# EAGLE board HW_EP02_Circuit_Part_Current&Resistance (EAGLE 9.7.0)

Size 296.37 x 30.69 mm. Coordinates in mm from the lower left corner, seen from the top.
Outline: 0,0 296.37,0 296.37,30.69 0,30.69 0,0
Copper layers (1*16): Top 0.035mm / dielectric 1.5mm / Bottom 0.035mm
Design rules "default": minimum track width 6mil, minimum drill 0.35mm, track to track 6mil, track to pad 6mil, pad to pad 6mil, via to via 6mil, smd to smd 6mil, copper to edge 40mil, drill to drill 6mil, minimum pad ring 10mil, minimum via ring 8mil, stop-mask expansion 4mil, vias tented up to drill 0mil, thermal gap 10mil

## Footprints (pad centres in the part's own frame; a part is rotated, then mirrored left to right if it is on the bottom)
BATTERY-GENERIC = drill 1.118 pad 3.15 octagon: + 2.54,0; - -2.54,0
RESAD1016W63L850D250B = drill 0.83 pad 1.43: 1 -5.08,0; 2 5.08,0

## Placement (x,y rotation side)
P1  BATTERYGENERIC  [BATTERY-GENERIC]  8.26,22.44 180 top
R1  20  [RESAD1016W63L850D250B]  66.76,24.11 0 top
R2  30  [RESAD1016W63L850D250B]  104.86,13.95 270 top
R3  50  [RESAD1016W63L850D250B]  117.56,13.95 270 top
R4  20  [RESAD1016W63L850D250B]  66.76,6.33 0 top
R5  20  [RESAD1016W63L850D250B]  254.48,24.19 0 top
R6  20  [RESAD1016W63L850D250B]  257.02,6.41 0 top
R7  30  [RESAD1016W63L850D250B]  277.34,19.11 270 top
R8  50  [RESAD1016W63L850D250B]  290.04,19.11 270 top

## Library data of the parts
P1 R1-R8 = Tinkercad

## Nets
P1+: P1.+ R1.1
P1-: P1.- R4.1
R2_2: R2.2 R3.2
R7_1: R5.2 R7.1 R8.1
R7_2: R6.2 R7.2 R8.2

## Tracks (layer width: path | path; a pad name or v marks a point on that pad's centre or on a via)
P1+  (1 unrouted)
P1-  (1 unrouted)
R2_2  (1 unrouted)
R7_1  (2 unrouted)
R7_2  (2 unrouted)